# Altium PCB iron_board_PCB.PcbDoc (part 1 of 2)
Units mil, origin at the board's own origin, x right, y up, seen from the top; angles counter-clockwise.
Board outline 1620 x 2202.72 mil, 4 copper layers (Top Layer, Mid Layer 1, Mid Layer 2, Bottom Layer), stack 61.811 mil thick; 72 components, 48 nets, 259 pads, 44 vias.
Unrouted connection lines stored in the file: 114.
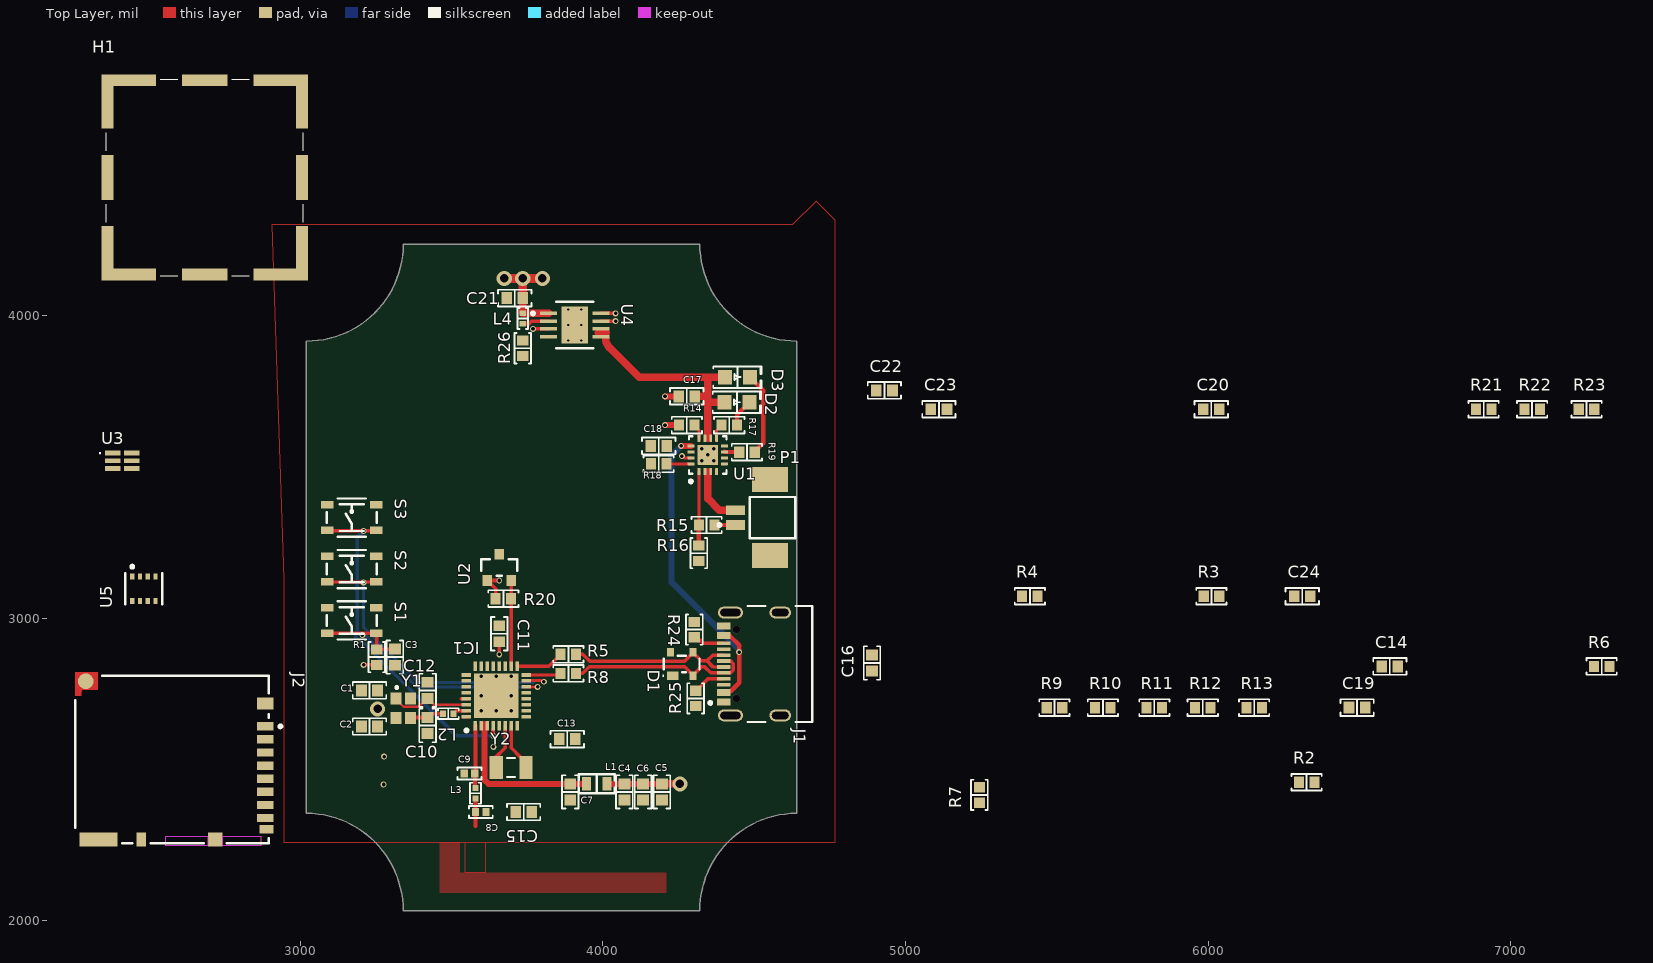
[diagram p0: Top Layer view]
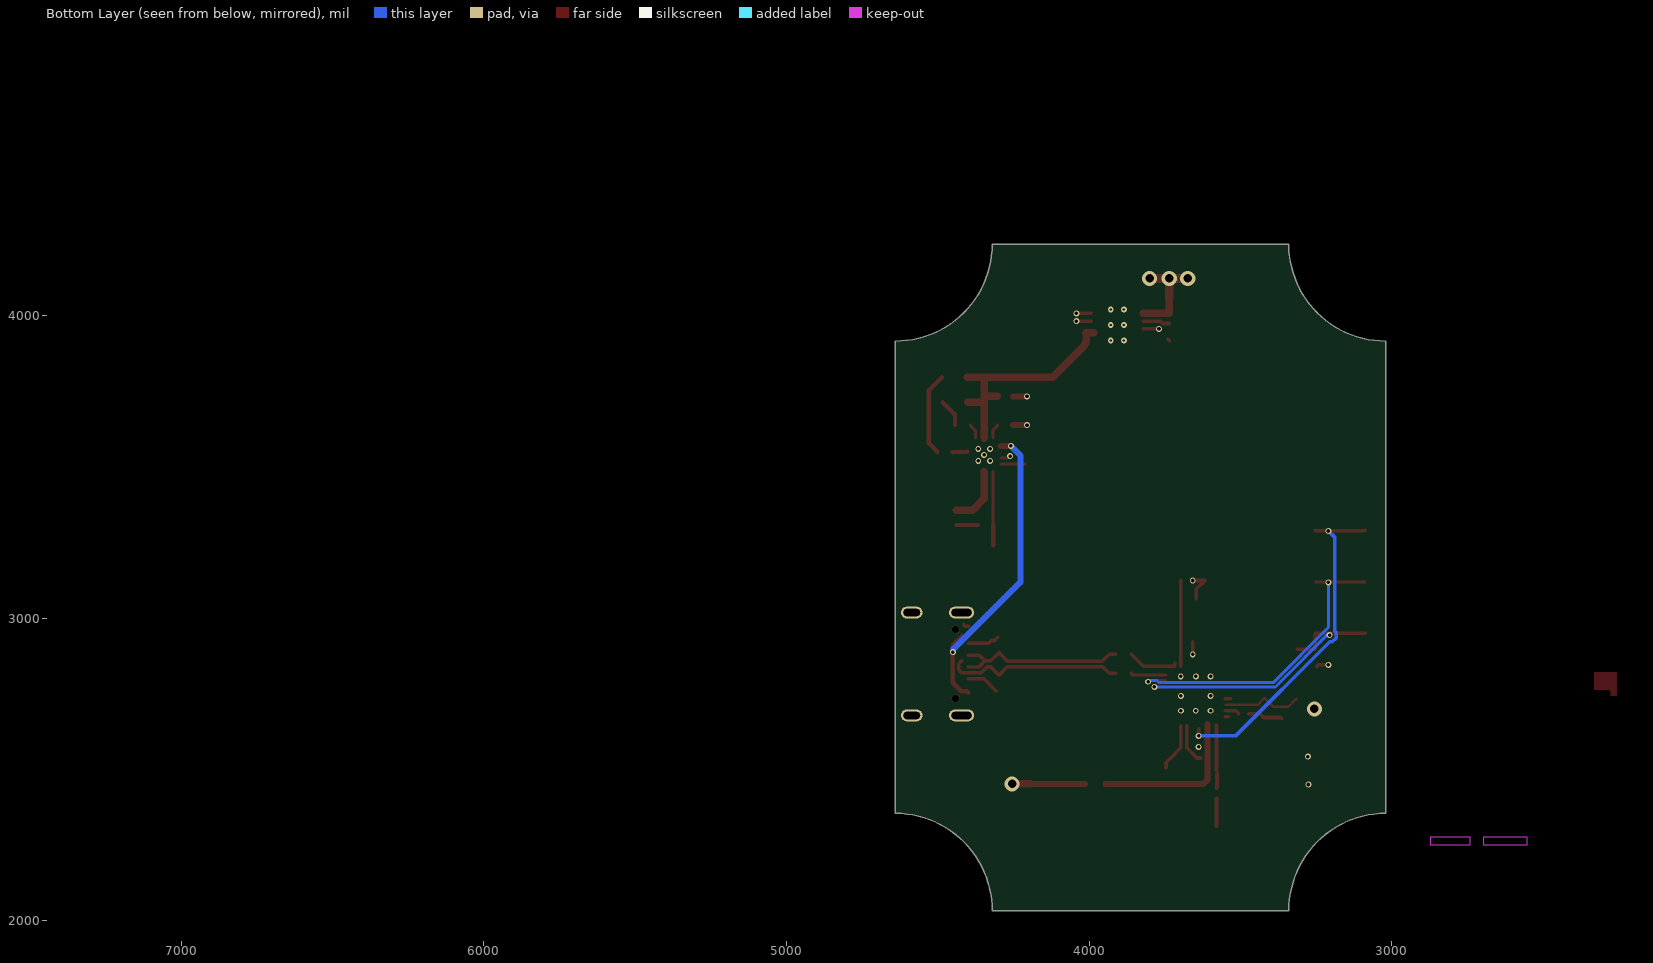
[diagram p1: Bottom Layer view, seen from below]
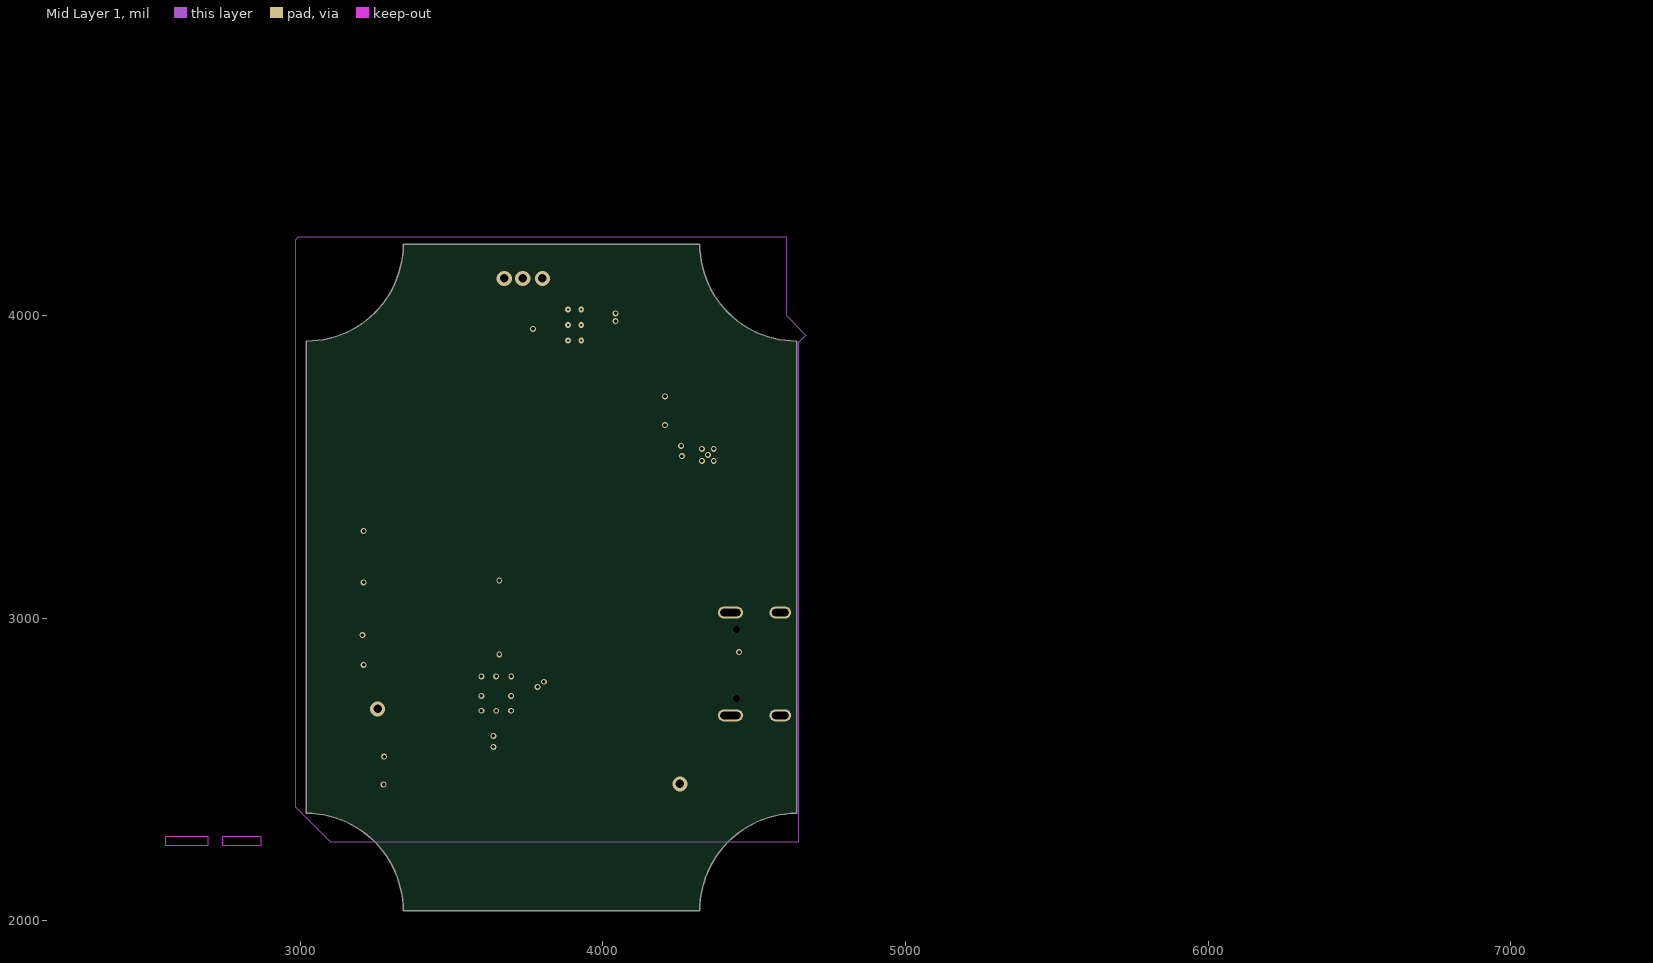
[diagram p2: Mid Layer 1]
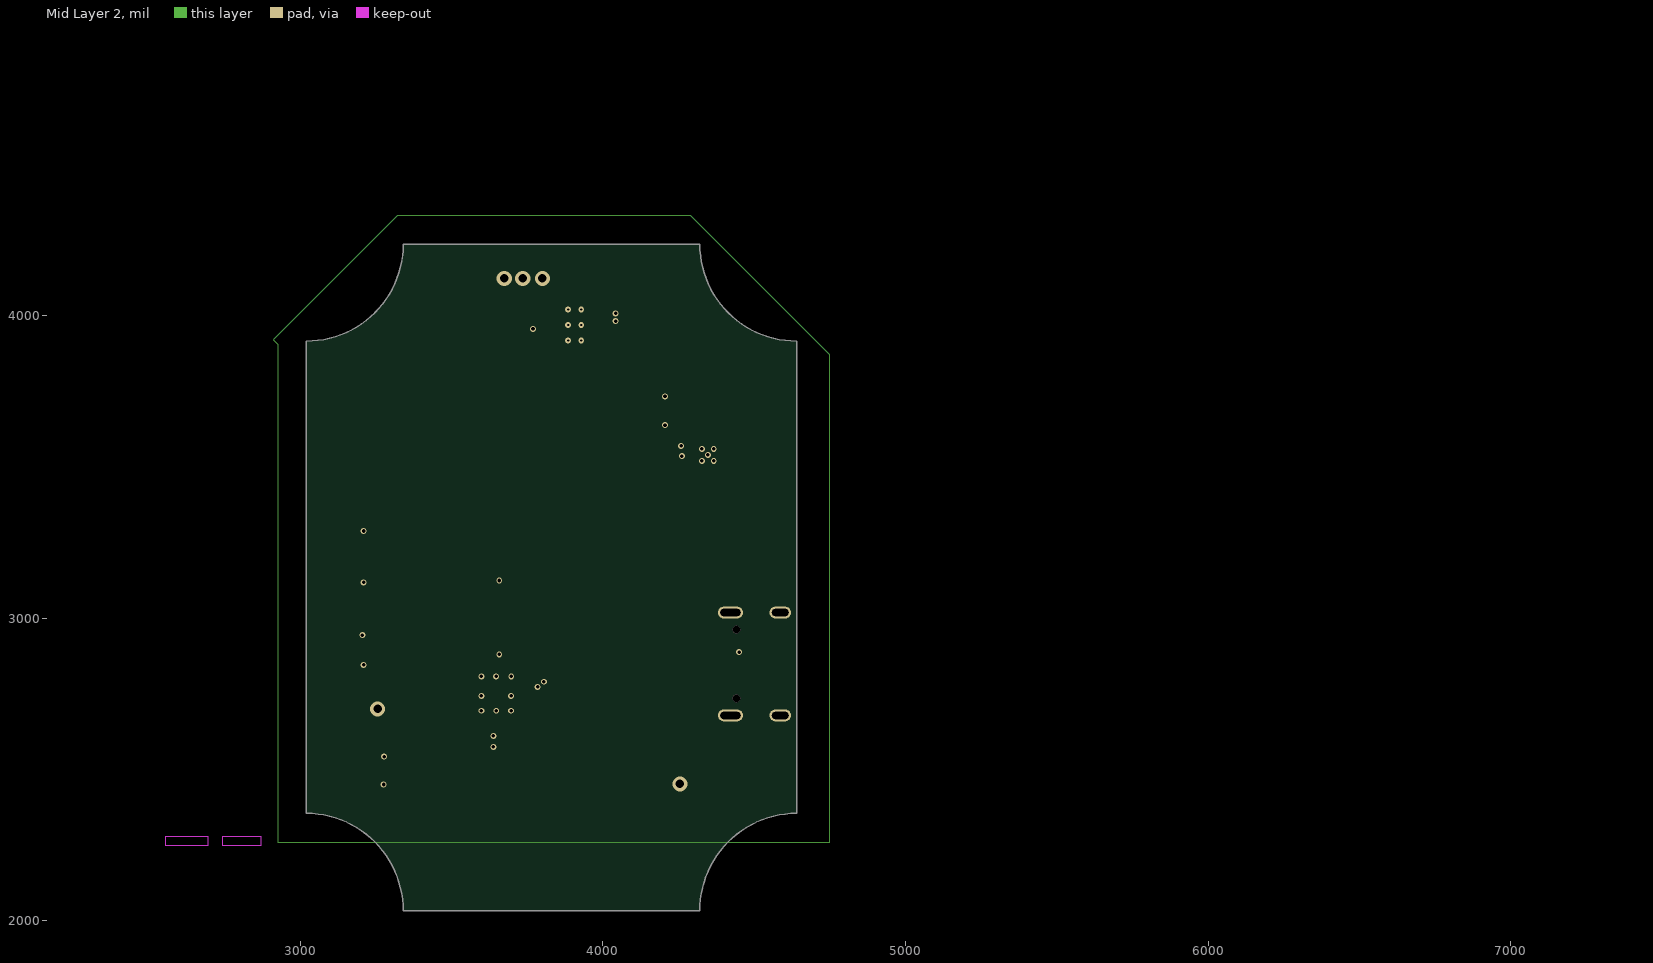
[diagram p3: Mid Layer 2]

## Layer stack, top to bottom
Top Solder: solder mask 0.5, Solder Resist, Dk 3.8
Top Layer: signal copper 1.378
Dielectric 1: prepreg 7.874, 7628, Dk 4.4
Mid Layer 1: signal copper 0.689
Core: core 41.929, FR-4, Dk 4.6
Mid Layer 2: signal copper 0.689
Dielectric 2: prepreg 7.874, 7628, Dk 4.4
Bottom Layer: signal copper 1.378
Bottom Solder: solder mask 0.5, Solder Resist, Dk 3.8

## Board outline
3020,2355 cw(c3018.61,2033.67) 3339.95,2032.28 4319.95,2032.28 cw(c4641.33,2033.61) 4640,2355 4640,3915 cw(c4640,4235) 4320,4235 3340,4235 cw(c3020,4235) 3020,3915

## Design rules (kind name [scope] priority, off if disabled: settings)
BoardOutlineClearance [All] p1: gap=7.87 ignorepadtopadclearanceinfootprint=FALSE
Clearance [All] p1: gap=4 ignorepadtopadclearanceinfootprint=FALSE except(5: Arc-Via Track-Via SMDPad-Via THPad-Via Via-Via Via-Fill Via-Poly Via-Region Via-Text; 9.84: Arc-Hole Track-Hole SMDPad-Hole THPad-Hole Via-Hole Fill-Hole Poly-Hole Region-Hole Text-Hole)
ComponentClearance [All] p1: gap=4 collisioncheckmode=3 verticalgap=4 showdistances=TRUE
DiffPairsRouting DiffPair_USBDiffPairsRouting [InDifferentialPair ('USB')] p1: maxlimit=10 minlimit=8 mostfreqgap=8 toplayer_maxgap=8 toplayer_minwidth=11.48 toplayer_maxwidth=11.48 toplayer_prefwidth=11.81 bottomlayer_maxgap=8 bottomlayer_minwidth=11.48 bottomlayer_maxwidth=11.48 bottomlayer_prefwidth=11.81 impedanceprofiledriven=TRUE impedanceprofileid={0D85EF6E-91C8-4706-80FB-7CD16DC580A1} impedanceprofilevalue=90.000000 maxuncoupledlength=500
DiffPairsRouting DiffPair_DiffPairsRouting [InDifferentialPair ('USB')] p2: maxlimit=10 minlimit=7.5 mostfreqgap=8 toplayer_mingap=8 toplayer_maxgap=8 toplayer_minwidth=11.48 toplayer_maxwidth=11.48 toplayer_prefwidth=11.81 bottomlayer_mingap=8 bottomlayer_maxgap=8 bottomlayer_minwidth=11.48 bottomlayer_maxwidth=11.48 bottomlayer_prefwidth=11.81 impedanceprofiledriven=TRUE impedanceprofileid={0D85EF6E-91C8-4706-80FB-7CD16DC580A1} impedanceprofilevalue=90.000000 maxuncoupledlength=500
DiffPairsRouting DiffPair_DiffPairsRouting_1 [InDifferentialPair ('USB')] p3: maxlimit=10 minlimit=7.5 mostfreqgap=8 toplayer_mingap=8 toplayer_maxgap=8 toplayer_minwidth=11.48 toplayer_maxwidth=11.48 toplayer_prefwidth=11.81 bottomlayer_mingap=8 bottomlayer_maxgap=8 bottomlayer_minwidth=11.48 bottomlayer_maxwidth=11.48 bottomlayer_prefwidth=11.81 impedanceprofiledriven=TRUE impedanceprofileid={0D85EF6E-91C8-4706-80FB-7CD16DC580A1} impedanceprofilevalue=90.000000 maxuncoupledlength=500
DiffPairsRouting DiffPair_DiffPairsRouting_2 [InDifferentialPair ('USB')] p4: maxlimit=10 minlimit=10 mostfreqgap=10 toplayer_minwidth=15 toplayer_maxwidth=15 toplayer_prefwidth=15 midlayer1_minwidth=15 midlayer1_maxwidth=15 midlayer1_prefwidth=15 midlayer2_minwidth=15 midlayer2_maxwidth=15 midlayer2_prefwidth=15 bottomlayer_minwidth=15 bottomlayer_maxwidth=15 bottomlayer_prefwidth=15 maxuncoupledlength=500
DiffPairsRouting DiffPair_DiffPairsRouting_3 [InDifferentialPair ('USB')] p5: maxlimit=10 minlimit=5 mostfreqgap=8 toplayer_mingap=8 toplayer_maxgap=8 toplayer_minwidth=11.48 toplayer_maxwidth=11.48 toplayer_prefwidth=11.81 bottomlayer_mingap=8 bottomlayer_maxgap=8 bottomlayer_minwidth=11.48 bottomlayer_maxwidth=11.48 bottomlayer_prefwidth=11.81 impedanceprofiledriven=TRUE impedanceprofileid={0D85EF6E-91C8-4706-80FB-7CD16DC580A1} impedanceprofilevalue=90.000000 maxuncoupledlength=500
DiffPairsRouting DiffPair_DiffPairsRouting_4 [InDifferentialPair ('USB')] p6: maxlimit=10 minlimit=10 mostfreqgap=10 toplayer_minwidth=15 toplayer_maxwidth=15 toplayer_prefwidth=15 midlayer1_minwidth=15 midlayer1_maxwidth=15 midlayer1_prefwidth=15 midlayer2_minwidth=15 midlayer2_maxwidth=15 midlayer2_prefwidth=15 bottomlayer_minwidth=15 bottomlayer_maxwidth=15 bottomlayer_prefwidth=15 maxuncoupledlength=500
DiffPairsRouting [All] p7: maxlimit=4 minlimit=4 mostfreqgap=4 toplayer_minwidth=4 toplayer_maxwidth=71497.94 toplayer_prefwidth=4 midlayer1_minwidth=4 midlayer1_maxwidth=71497.94 midlayer1_prefwidth=4 midlayer2_minwidth=4 midlayer2_maxwidth=71497.94 midlayer2_prefwidth=4 bottomlayer_minwidth=4 bottomlayer_maxwidth=71497.94 bottomlayer_prefwidth=4 maxuncoupledlength=500
Height [All] p1: minheight=0 maxheight=71497.94 prefheight=500
HoleSize [All] p1: absolutevalues=TRUE maxlimit=248.03 minlimit=7.87 maxpercent=80.000 minpercent=20.000
HoleToHoleClearance [All] p1: gap=9.84 allowstackedmicrovias=FALSE
MatchedLengths DiffPair_USBMatchedLengths [InDifferentialPair ('USB')] p1: tolerance=1000 checknetsindiffpair=FALSE checkdiffpairvsdiffpair=TRUE checkxsignals=TRUE checkothers=TRUE
MatchedLengths DiffPair_MatchedLengths [InDifferentialPair ('USB')] p2: tolerance=1000 checknetsindiffpair=FALSE checkdiffpairvsdiffpair=TRUE checkxsignals=TRUE checkothers=TRUE
MatchedLengths DiffPair_MatchedLengths_1 [InDifferentialPair ('USB')] p3: tolerance=1000 checknetsindiffpair=FALSE checkdiffpairvsdiffpair=TRUE checkxsignals=TRUE checkothers=TRUE
MatchedLengths DiffPair_MatchedLengths_2 [InDifferentialPair ('USB')] p4: tolerance=1000 checknetsindiffpair=FALSE checkdiffpairvsdiffpair=TRUE checkxsignals=TRUE checkothers=TRUE
MatchedLengths DiffPair_MatchedLengths_3 [InDifferentialPair ('USB')] p5: tolerance=1000 checknetsindiffpair=TRUE checkdiffpairvsdiffpair=FALSE checkxsignals=FALSE checkothers=FALSE
MatchedLengths DiffPair_MatchedLengths_4 [InDifferentialPair ('USB')] p6: tolerance=1000 checknetsindiffpair=FALSE checkdiffpairvsdiffpair=TRUE checkxsignals=TRUE checkothers=TRUE
MinimumAnnularRing [All] p1: minimumring=3
MinimumSolderMaskSliver [All] p1: minsoldermaskwidth=0
PlaneClearance [All] p1: clearance=12
PlaneConnect PlaneConnectPowerPads [InPadClass('PowerPads')] p1: planeconnectstyle=Direct reliefexpansion=20 reliefentries=4 reliefconductorwidth=10 reliefairgap=10
PlaneConnect [All] p2: pad.planeconnectstyle=Relief pad.reliefexpansion=11.81 pad.reliefentries=4 pad.reliefconductorwidth=4 pad.reliefairgap=4 via.planeconnectstyle=Direct via.reliefexpansion=11.81 via.reliefentries=4 via.reliefconductorwidth=5 via.reliefairgap=5
PolygonConnect PolygonConnectPowerPads [All vs (InPadClass('PowerPads'))] p1: connectstyle=Direct reliefconductorwidth=10 reliefentries=4 polygonreliefangle="90 Angle" airgapwidth=10
PolygonConnect [All] p2: thpad.connectstyle=Relief thpad.reliefconductorwidth=8 thpad.reliefentries=4 thpad.polygonreliefangle="45 Angle" thpad.airgapwidth=8 smdpad.connectstyle=Relief smdpad.reliefconductorwidth=8 smdpad.reliefentries=4 smdpad.polygonreliefangle="45 Angle" smdpad.airgapwidth=8 via.connectstyle=Direct via.reliefconductorwidth=5 via.reliefentries=4 via.polygonreliefangle="90 Angle" via.airgapwidth=5
RoutingVias [All] p1: holewidth=7.87 width=17.72 viastyle="Through Hole" minholewidth=7.87 minwidth=17.72 maxholewidth=248.03 maxwidth=257.87
SilkToSilkClearance [All] p1: silktosilkclearance=0
SilkToSolderMaskClearance [IsPad] p1: minsilkscreentomaskgap=4 clearancetoexposedcopper=TRUE
SolderMaskExpansion [All] p1: expansion=2.95 istentingtop=FALSE
Width [All] p1: maxlimit=71497.94 minlimit=4 preferedwidth=12.8 midlayer1_maxwidth=71497.94 midlayer1_prefwidth=10.04 midlayer2_maxwidth=71497.94 midlayer2_prefwidth=10.04 minimp=50.000000 maximp=50.000000 favimp=50.000000
20 further rules are at their usual default settings.

## Classes and differential pairs
net class USB_P: USB_N
component class peripherals: C17 C18 C19 C20 C21 C22 C23 D2 D3 J1 J2 L4 P1 R9 R10 R11 R12 R13 R14 R15 R16 R17 R18 R19 R20 R21 R22 R23 R24 R25 R26 U1 U2 U3 U4 U5
component class MCU: C1 C2 C3 C4 C5 C6 C7 C8 C9 C10 C11 C12 C13 C14 C15 C16 C24 D1 H1 IC1 L1 L2 L3 R1 R2 R3 R4 R5 R6 R7 R8 S1 S2 S3 Y1 Y2
differential pair XTAL: +XTAL_P -XTAL_N
differential pair USB: +USB_P -USB_N
differential pair RTC: +RTC_P -RTC_N

## Components (designator, comment, footprint, x,y, rotation, side; value= is the part's Value field where it differs from the comment)
C1 "1 µF" "CAP 0603_1608" 3228.61,2761.06 r0 top
C2 "0.1 µF" "CAP 0603_1608" 3228.61,2641.68 r0 top
C3 "0.1 µF" "CAP 0603_1608" 3312.55,2870.86 r90 top
C4 "10 µF" "CAP 0603_1608" 4071.12,2425.43 r270 top
C5 "1 µF" "CAP 0603_1608" 4132.52,2425.43 r90 top
C6 "0.1 µF" "CAP 0603_1608" 4194.52,2425.43 r90 top
C7 "0.1 µF" "CAP 0603_1608" 3891.84,2425.43 r90 top
C8 "TBD" "CAP 0402_1005" 3596.57,2359.14 r0 top
C9 "TBD" "CAP 0402_1005" 3559.17,2486.46 r0 top
C10 "10 pF" "CAP 0603_1608" 3420.32,2644.85 r270 top
C11 "0.1 µF" "CAP 0603_1608" 3657.27,2948 r270 top
C12 "10 pF" "CAP 0603_1608" 3420.32,2761.06 r90 top
C13 "0.1 µF" "CAP 0603_1608" 3882,2600 r180 top
C14 "1 µF" "CAP 0603_1608" 6600,2840 r0 top
C15 "6.8 pF" "CAP 0603_1608" 3738.02,2359.14 r180 top
C16 "6.8 pF" "CAP 0603_1608" 4889,2851.57 r90 top
C17 "4.7 µF" "CAP 0603_1608" 4276.98,3732.68 r0 top
C18 "1 µF" "CAP 0603_1608" 4184.18,3568.65 r0 top
C19 "10 µF" "CAP 0603_1608" 6491.85,2704 r0 top
C20 "0.1 µF" "CAP 0603_1608" 6010,3690 r0 top
C21 "10 µF" "CAP 0603_1608" 3708.43,4057 r180 top
C22 "0.1 µF" "CAP 0603_1608" 4930,3752 r0 top
C23 "0.1 µF" "CAP 0603_1608" 5110,3690 r0 top
C24 "0.1 µF" "CAP 0603_1608" 6310.57,3072 r0 top
D1 "PRTR5V0U2X,215" NXP-SOT143B-4_V 4260.02,2848.16 r90 top
D2 "Green" "LED 0805_2012 GREEN" 4442.8,3713 r0 top
D3 "Yellow" "LED 0805_2012 YELLOW" 4444.43,3796 r0 top
H1 "2118707-2" 21187072 2684.13,4455.98 r0 top
IC1 "ESP32-C6FH4" QFN50P500X500X90-33N 3647.43,2742.9 r90 top
J1 "USB4105-GF-A" FP-USB4105-GF-A-MFG 4540.02,2848.16 r90 top locked
J2 "DM3BT-DSF-PEJS" FP-DM3BT-DSF-PEJS-MFG 2576,2533 r270 top
L1 "2nH" "IND 0603_1608 RF WW" 3979.52,2452 r180 top
L2 "TBD" "IND 0402_1005 RF WW" 3489,2684 r180 top
L3 "TBD" "IND 0402_1005 RF WW" 3578.86,2421.14 r90 top
L4 "2.2 µH" "IND 0402_1005 RF WW" 3735,3989.68 r90 top
P1 "53261-0271" MOLX-53261-0271_V 4495,3332 r90 top
R1 "10 kOhms" "RES 0603_1608" 3252.68,2870.86 r270 top
R2 "0 Ohms" "RES 0603_1608" 6325,2457.44 r0 top
R3 "0 Ohms" "RES 0603_1608" 6010.57,3072 r0 top
R4 "0 Ohms" "RES 0603_1608" 5410.57,3072 r0 top
R5 "0 Ohms" "RES 0603_1608" 3885.7,2880 r180 top
R6 "10 kOhms" "RES 0603_1608" 7300,2840 r0 top
R7 "TBD" "RES 0603_1608" 5244,2415.41 r90 top
R8 "0 Ohms" "RES 0603_1608" 3885.7,2817 r0 top
R9 "10 kOhms" "RES 0603_1608" 5491.85,2704 r0 top
R10 "10 kOhms" "RES 0603_1608" 5651.85,2704 r0 top
R11 "10 kOhms" "RES 0603_1608" 5821.85,2704 r0 top
R12 "10 kOhms" "RES 0603_1608" 5981.85,2704 r0 top
R13 "10 kOhms" "RES 0603_1608" 6151.85,2704 r0 top
R14 "3.09 kOhms" "RES 0603_1608" 4276.98,3637.69 r0 top
R15 "0 Ohms" "RES 0603_1608" 4342.41,3307.39 r0 top
R16 "0 Ohms" "RES 0603_1608" 4316.82,3214.41 r90 top
R17 "0 Ohms" "RES 0603_1608" 4417.21,3637.69 r0 top
R18 "1.8 kOhms" "RES 0603_1608" 4184.18,3509.59 r0 top
R19 "0 Ohms" "RES 0603_1608" 4475.87,3548.13 r0 top
R20 "1.2 kOhms" "RES 0603_1608" 3671.05,3064 r0 top
R21 "10 kOhms" "RES 0603_1608" 6910,3690 r0 top
R22 "10 kOhms" "RES 0603_1608" 7070,3690 r0 top
R23 "10 kOhms" "RES 0603_1608" 7250,3690 r0 top
R24 "5.1 kOhms" "RES 0603_1608" 4301.97,2961.94 r270 top
R25 "5.1 kOhms" "RES 0603_1608" 4306.28,2734.38 r90 top
R26 "52.3 kOhms" "RES 0603_1608" 3735,3891.41 r90 top
S1 "PTS810 SJM 250 SMTR LFS" "C&K PTS810" 3170,2992 r0 top
S2 "PTS810 SJM 250 SMTR LFS" "C&K PTS810" 3170,3162 r0 top
S3 "PTS810 SJM 250 SMTR LFS" "C&K PTS810" 3170,3332 r0 top
U1 "BQ24073RGTT" RGT0016C_V 4346.35,3539.12 r90 top
U2 "TLE49655MXTSA1" FP-PG-SOT23-3-MFG 3657.27,3167.31 r90 top
U3 "TSL2561FN" AMS-FN-6-2000X2000DE_V 2411,3520 r0 top
U4 "TPS62842DGRR" FP-DGR0008A-MFG 3906.65,3968.18 r0 top
U5 "BME280" FP-BME280-MFG 2483,3097 r90 top
Y1 "830108208709" WE-XTAL_CFPX-218 3340.11,2701.72 r270 top
Y2 "ABS07-32.768KHZ-7-1-T" FP-ABS07-MFG 3696.64,2506.15 r0 top

## Footprints (in the part's own frame and the unit in brackets; to place one, negate y for a bottom-side part, rotate by r counter-clockwise, add the part's x,y. Pads: shape width x height; smd on the part's side, far side on the other; paste and mask are expansions set on the pad)
21187072 [mm]
  rect 1x4.55 smd: 1(-8.15,6.375) 3(-8.15,-6.375) 7(8.15,-6.375) 9(8.15,6.375)
  rect 1x3.8 smd: 2(-8.15,0) 8(8.15,0)
  rect 4.55x1 smd: 4(-6.375,-8.15) 6(6.375,-8.15) 10(6.375,8.15) 12(-6.375,8.15)
  rect 3.8x1 smd: 5(0,-8.15) 11(0,8.15)
  silkscreen extent -8.25,-8.25 8.25,8.25, body extent -8.25,-8.25 8.25,8.25, height 3.6
AMS-FN-6-2000X2000DE_V [mm] "SON, 6-Leads, Body 2x2mm, Pitch 0.65mm"
  rect 1.3x0.4 smd: 1(-0.8,0.65) 2(-0.8,0) 3(-0.8,-0.65) 4(0.8,-0.65) 5(0.8,0) 6(0.8,0.65)
  silkscreen extent -1.9,0.59 -1.8,0.68, body extent -1,-1 1,1, height 0.7
"C&K PTS810" [mm] "T-Switch, 4-leads, body 4.2x3.2mm, C&K PTS810 SJM 250 SMTR LFS"
  rect 1.05x0.65 smd mask+0.1: 1(-2.075,1.075) 2(2.075,1.075) 3(-2.075,-1.075) 4(2.075,-1.075)
  silkscreen extent -2.1,-1.6 2.1,1.6, body extent -2.29,-1.6 2.29,1.6, height 2.7
"CAP 0402_1005" [mm] "Chip Capacitor, 2-Leads, Body 1.02x0.51mm, IPC Medium Density"
  rect 0.6x0.64 smd: 1(-0.44,0) 2(0.44,0)
  silkscreen extent -1,-0.5 1,0.5, body extent -0.5,-0.26 0.5,0.26, height 0.52
"CAP 0603_1608" [mm] "Chip Capacitor, 2-Leads, Body 1.60x0.80mm, IPC Medium Density"
  rect 0.9x1 smd: 1(-0.675,0) 2(0.675,0)
  silkscreen extent -1.4,-0.7 1.4,0.7, body extent -0.8,-0.41 0.8,0.41, height 0.82
FP-ABS07-MFG [mm]
  rect 1.1x1.9 smd paste+0 mask+0: 1(-1.25,0) 2(1.25,0)
  silkscreen extent -0.32,-0.8 0.32,0.8, body extent -1.9,-1.05 1.9,1.05, height 0.25
FP-BME280-MFG [mm]
  rect 0.5x0.35 smd paste+0 mask+0: 1(1.025,0.975) 2(1.025,0.325) 3(1.025,-0.325) 4(1.025,-0.975) 5(-1.025,-0.975) 6(-1.025,-0.325) 7(-1.025,0.325) 8(-1.025,0.975)
  silkscreen extent -1.3,-1.55 1.97,1.55
FP-DGR0008A-MFG [mm]
  rrect33% 1.45x0.3 smd paste+0 mask+0: 1(-2.2,0.975) 2(-2.2,0.325) 3(-2.2,-0.325) 4(-2.2,-0.975) 5(2.2,-0.975) 6(2.2,-0.325) 7(2.2,0.325) 8(2.2,0.975)
  rect 2.2x3.1 smd paste-1000 mask-1000: 9(0,0)
  silkscreen extent -3.62,-1.95 1.55,1.95, body extent -3.03,-1.95 3.03,1.95, height 0.25
FP-DM3BT-DSF-PEJS-MFG [mm]
  rect 0.7x1.4 smd paste+0 mask+0: 1(-2.775,7.825) 2(-1.675,7.825) 3(-0.575,7.825) 4(0.525,7.825) 5(1.625,7.825) 6(2.725,7.825) 7(3.825,7.825) 8(4.925,7.825)
  rect 0.7x1.2 smd paste+0 mask+0: 9(5.875,7.925)
  rect 1.2x0.8 smd paste+0 mask+0: 10(6.725,-2.575)
  rect 1x1.4 smd paste+0 mask+0: 11(-4.675,7.825)
  rect 1.2x1.2 smd paste+0 mask+0: 12(6.725,3.625)
  round 1.311 smd paste+0 mask+0: 13(-6.553,-7.234)
  rect 1.2x3.2 smd paste+0 mask+0: 14(6.725,-6.175)
  Top Layer region: -7.325,-8.125 -7.325,-6.225 -5.825,-6.225 -5.825,-7.475 -5.675,-7.625 -5.325,-7.625 -5.325,-8.125
  Keep-Out Layer region: 6.475,4.225 7.225,4.225 7.225,7.475 6.475,7.475
  Keep-Out Layer region: 6.475,-0.575 7.225,-0.575 7.225,3.025 6.475,3.025
  silkscreen extent -7.02,-8.13 7.02,9.23, body extent -7.42,-8.23 7.42,8.62, height 0.25
FP-PG-SOT23-3-MFG [mm]
  rect 0.9x0.8 smd paste+0 mask+0: 1(-1.1,1) 2(-1.1,-1) 3(1.1,0)
  silkscreen extent -0.7,-1.5 0.7,1.5, body extent -1.65,-1.6 1.65,1.6, height 0.25
FP-USB4105-GF-A-MFG [mm]
  rrect100% 1x2.1 hole 1.7 slot 0.6 at 0 deg paste-2539.97 mask+0: 1(-4.32,3.015) 2(4.32,3.015)
  rrect100% 1x1.8 hole 1.4 slot 0.6 at 0 deg paste-2539.97 mask+0: 3(-4.32,-1.165) 4(4.32,-1.165)
  rect 0.6x1.15 smd paste+0 mask+0: A1-B12(-3.2,3.59) A4-B9(-2.4,3.59) B1-A12(3.2,3.59) B4-A9(2.4,3.59)
  rect 0.3x1.15 smd paste+0 mask+0: A5(-1.25,3.59) A6(-0.25,3.59) A7(0.25,3.59) A8(1.25,3.59) B5(1.75,3.59) B6(0.75,3.59) B7(-0.75,3.59) B8(-1.75,3.59)
  round 0.65 hole 0.65 unplated paste-2539.97 mask+0: ""(-2.89,2.515) ""(2.89,2.515)
  silkscreen extent -4.86,-3.84 4.86,4.84, body extent -4.96,-3.94 4.96,4.27, height 0.25
"IND 0402_1005 RF WW" [mm] "Chip Inductor, 2-Leads, Body 1.00x0.50mm, IPC High Density"
  rect 0.48x0.54 smd: 1(-0.44,0) 2(0.44,0)
  silkscreen extent -0.87,-0.45 0.87,0.45, body extent -0.5,-0.29 0.5,0.29, height 0.51
"IND 0603_1608 RF WW" [mm] "Chip Inductor, 2-Leads, Body 1.65x0.99mm, IPC Medium Density"
  rect 0.76x1.13 smd: 1(-0.875,0) 2(0.875,0)
  silkscreen extent -1.5,-0.8 1.5,0.8, body extent -0.84,-0.58 0.83,0.58, height 1
"LED 0805_2012 GREEN" [mm] "Chip Diode, 2-Leads, Body 2.00x1.25mm, IPC Medium Density"
  rect 1.2x1.2 smd: 1(-1.05,0) 2(1.05,0)
  silkscreen extent -2.03,-0.9 2.03,0.9, body extent -1,-0.62 1,0.63, height 0.9
"LED 0805_2012 YELLOW" [mm] "Chip Diode, 2-Leads, Body 2.00x1.25mm, IPC Medium Density"
  rect 1.2x1.2 smd: 1(-1.05,0) 2(1.05,0)
  silkscreen extent -2.03,-0.9 2.03,0.9, body extent -1,-0.62 1,0.63, height 0.9
MOLX-53261-0271_V [mm] "Header, 2-Leads, Pitch 1.25mm"
  rect 0.8x1.6 smd: 1(-0.625,1.45) 2(0.625,1.45)
  rect 2.1x3 smd: MP1(-3.175,-1.45) MP2(3.175,-1.45)
  silkscreen extent -1.72,-3.55 1.73,2.92, body extent -3.82,-3.55 3.83,1.65, height 3.41
NXP-SOT143B-4_V [mm] "SOT143, 4-Leads, Body 3x1.4mm"
  rect 0.7x1 smd: 1(-1,0.75)
  rect 0.7x0.6 smd: 2(-1,-0.95) 3(1,-0.95) 4(1,0.95)
  silkscreen extent -1.05,-1.5 0.7,1.6, body extent -0.7,-1.5 0.7,1.5, height 1.1
QFN50P500X500X90-33N [mm]
  rect 0.8x0.3 smd: 1(-2.5,1.75) 2(-2.5,1.25) 3(-2.5,0.75) 4(-2.5,0.25) 5(-2.5,-0.25) 6(-2.5,-0.75) 7(-2.5,-1.25) 8(-2.5,-1.75) 17(2.5,-1.75) 18(2.5,-1.25) 19(2.5,-0.75) 20(2.5,-0.25) 21(2.5,0.25) 22(2.5,0.75) 23(2.5,1.25) 24(2.5,1.75)
  rect 0.3x0.8 smd: 9(-1.75,-2.5) 10(-1.25,-2.5) 11(-0.75,-2.5) 12(-0.25,-2.5) 13(0.25,-2.5) 14(0.75,-2.5) 15(1.25,-2.5) 16(1.75,-2.5) 25(1.75,2.5) 26(1.25,2.5) 27(0.75,2.5) 28(0.25,2.5) 29(-0.25,2.5) 30(-0.75,2.5) 31(-1.25,2.5) 32(-1.75,2.5)
  rect 3.75x3.75 smd: 33(0,0)
  silkscreen extent -3.02,2.37 -2.78,2.62, body extent -2.55,-2.55 2.55,2.55, height 0.9
"RES 0603_1608" [mm] "Chip Resistor, 2-Leads, Body 1.60x0.80mm, IPC Medium Density"
  rect 0.85x0.95 smd: 1(-0.65,0) 2(0.65,0)
  silkscreen extent -1.27,-0.7 1.27,0.7, body extent -0.8,-0.4 0.8,0.4, height 0.45
RGT0016C_V [mm] "QFN, 16-Leads, Body 3x3mm, Pitch 0.5mm, Thermal Pad 1.65x1.65mm"
  rrect40% 0.6x0.25 smd: 1(-1.4,0.75) 2(-1.4,0.25) 3(-1.4,-0.25) 4(-1.4,-0.75) 9(1.4,-0.75) 10(1.4,-0.25) 11(1.4,0.25) 12(1.4,0.75)
  rrect40% 0.25x0.6 smd: 5(-0.75,-1.4) 6(-0.25,-1.4) 7(0.25,-1.4) 8(0.75,-1.4) 13(0.75,1.4) 14(0.25,1.4) 15(-0.25,1.4) 16(-0.75,1.4)
  rrect6% 1.55x1.55 on Top Paste: 17(0,0)
  rrect6% 1.7x1.7 smd paste-0.85: 17(0,0)
  silkscreen extent -2.35,-1.57 1.57,1.58, body extent -1.5,-1.5 1.5,1.5, height 1
WE-XTAL_CFPX-218 [mm] "Quartz Crystal, size CFPX-218, body 2.5x2mm"
  rect 1x0.9 smd: 1(-0.825,-0.613) 2(0.825,-0.613) 3(0.825,0.613) 4(-0.825,0.613)
  silkscreen extent -1.85,-0.65 -1.65,-0.45, body extent -1.25,-1 1.25,1, height 0.55

## Part data
C1 C5 C14 C18: library part CC0603KRX7R6BB105, "CAP CER 1UF 10V X7R 0603", Device Package="0603 (1608 Metric)", manufacturer=Yageo, Operating Temperature="-55°C ~ 125°C", Supplier Part Number 1=311-1796-1-ND, Temperature Coefficient=X7R, Tolerance=±10%, Voltage - Rated=10V, Applications="General Purpose", Capacitance="1 µF", componentlink1description=Datasheet, componentlink1url=https://www.yageo.com/upload/media/product/productsearch/datasheet/mlcc/UPY-GPHC_X7R_6.3V-to-50V_18.pdf, componentlink2description="DigiKey Link", componentlink2url=https://www.digikey.com/en/products/detail/yageo/CC0603KRX7R6BB105/5195204, lastupdated="15.01.2024 20:10:05", Lifecycle Status=Active, Minimum Order=1, Mounting Type="Surface Mount, MLCC", Package / Case="0603 (1608 Metric)", packaging=TapeAndReel, Part Number=CC0603KRX7R6BB105, Part Status=Active, partid=2290, price=0.01, series=CC, Size / Dimension="0.063\" L x 0.031\" W (1.60mm x 0.80mm)", Supplier 1=DigiKey, Thickness (Max)="0.035\" (0.90mm)"
C2 C3 C6 C7 C11 C13 C20 C22 C23 C24: library part CS0603KRX7R7BB104, "CAP CER 0.1UF 16V X7R 0603", Device Package="0603 (1608 Metric)", manufacturer=Yageo, Operating Temperature="-55°C ~ 125°C", Supplier Part Number 1=311-3560-1-ND, Temperature Coefficient=X7R, Tolerance=±10%, Voltage - Rated=16V, Applications="Boardflex Sensitive", Capacitance="0.1 µF", componentlink1description=Datasheet, componentlink1url=http://www.yageo.com/NewPortal/yageodocoutput?fileName=/pdf/MLCC/UPY-ST_NPOX7R_16V-to-3KV_5.pdf, componentlink2description="DigiKey Link", componentlink2url=https://www.digikey.com/en/products/detail/yageo/CS0603KRX7R7BB104/6097897, Features="Soft Termination", lastupdated="15.01.2024 20:10:05", Lifecycle Status=Active, Minimum Order=1, Mounting Type="Surface Mount, MLCC", Package / Case="0603 (1608 Metric)", packaging=TapeAndReel, Part Number=CS0603KRX7R7BB104, Part Status=Active, partid=2286, price=0.01, series=CS, Size / Dimension="0.063\" L x 0.031\" W (1.60mm x 0.80mm)", Supplier 1=DigiKey, Thickness (Max)="0.037\" (0.95mm)"
C4 C19 C21: library part GRM188D71A106KA73D, "CAP CER 10UF 10V X7T 0603", Device Package="0603 (1608 Metric)", manufacturer="Murata Electronics", Operating Temperature="-55°C ~ 125°C", Supplier Part Number 1=490-14461-1-ND, Temperature Coefficient=X7T, Tolerance=±10%, Voltage - Rated=10V, Applications="General Purpose", Capacitance="10 µF", componentlink1description=Datasheet, componentlink1url=https://search.murata.co.jp/Ceramy/image/img/A01X/G101/ENG/GRM188D71A106KA73-01.pdf, componentlink2description="DigiKey Link", componentlink2url=https://www.digikey.com/en/products/detail/murata-electronics/GRM188D71A106KA73D/6606090, lastupdated="15.01.2024 20:10:04", Lifecycle Status=Active, Minimum Order=1, Mounting Type="Surface Mount, MLCC", Package / Case="0603 (1608 Metric)", packaging=TapeAndReel, Part Number=GRM188D71A106KA73D, Part Status=Active, partid=2489, price=0.03, series=GRM, Size / Dimension="0.063\" L x 0.031\" W (1.60mm x 0.80mm)", Supplier 1=DigiKey, Thickness (Max)="0.039\" (1.00mm)"
C8: library part 04023A6R8CAT2A, "CAP CER 6.8PF 25V C0G/NP0 0402", Device Package="0402 (1005 Metric)", manufacturer="AVX Corporation", Operating Temperature="-55°C ~ 125°C", Supplier Part Number 1=478-12617-1-ND, Temperature Coefficient="C0G, NP0", Tolerance=±0.25pF, Voltage - Rated=25V, Applications="General Purpose", Capacitance=TBD, componentlink1description=Datasheet, componentlink1url=http://datasheets.avx.com/C0GNP0-Dielectric.pdf, componentlink2description="DigiKey Link", componentlink2url=http://digikey.com/product-detail/en/avx-corporation/04023A6R8CAT2A/478-12617-1-ND/9949155, lastupdated="08.02.2022 12:26:50", Lifecycle Status=Active, Minimum Order=1, Mounting Type="Surface Mount, MLCC", Package / Case="0402 (1005 Metric)", packaging=TapeAndReel, Part Number=04023A6R8CAT2A, Part Status=Active, partid=6987, price=0.06, series=-, Size / Dimension="0.039\" L x 0.020\" W (1.00mm x 0.50mm)", Supplier 1=DigiKey, Thickness (Max)="0.022\" (0.56mm)"
C9: library part 04023A6R8CAT2A, "CAP CER 6.8PF 25V C0G/NP0 0402", Capacitance=6.8pF, Device Package="0402 (1005 Metric)", manufacturer="AVX Corporation", Operating Temperature="-55°C ~ 125°C", Supplier Part Number 1=478-12617-1-ND, Temperature Coefficient="C0G, NP0", Tolerance=±0.25pF, Voltage - Rated=25V, Applications="General Purpose", componentlink1description=Datasheet, componentlink1url=http://datasheets.avx.com/C0GNP0-Dielectric.pdf, componentlink2description="DigiKey Link", componentlink2url=http://digikey.com/product-detail/en/avx-corporation/04023A6R8CAT2A/478-12617-1-ND/9949155, lastupdated="08.02.2022 12:26:50", Lifecycle Status=Active, Minimum Order=1, Mounting Type="Surface Mount, MLCC", Package / Case="0402 (1005 Metric)", packaging=TapeAndReel, Part Number=04023A6R8CAT2A, Part Status=Active, partid=6987, price=0.06, series=-, Size / Dimension="0.039\" L x 0.020\" W (1.00mm x 0.50mm)", Supplier 1=DigiKey, Thickness (Max)="0.022\" (0.56mm)"
C10 C12: library part VJ0603A100FXACW1BC, "CAP CER 10PF 50V C0G/NP0 0603", Device Package="0603 (1608 Metric)", manufacturer="Vishay Vitramon", Operating Temperature="-55°C ~ 125°C", Supplier Part Number 1=720-VJ0603A100FXACW1BCCT-ND, Temperature Coefficient="C0G, NP0", Tolerance=±1%, Voltage - Rated=50V, Applications="General Purpose", Capacitance="10 pF", componentlink1description=Datasheet, componentlink1url=https://www.vishay.com/docs/28548/vjw1bcbascomseries.pdf, componentlink2description="DigiKey Link", componentlink2url=https://www.digikey.com/en/products/detail/vishay-vitramon/VJ0603A100FXACW1BC/8302770, lastupdated="15.01.2024 20:09:38", Lifecycle Status=Active, Minimum Order=1, Mounting Type="Surface Mount, MLCC", Package / Case="0603 (1608 Metric)", packaging=TapeAndReel, Part Number=VJ0603A100FXACW1BC, Part Status=Active, partid=42121, price=0.01, series="VJ W1BC", Size / Dimension="0.063\" L x 0.031\" W (1.60mm x 0.80mm)", Supplier 1=DigiKey, Thickness (Max)="0.034\" (0.87mm)"
C15 C16: library part GQM1875C2E6R8WB12D, "CAP CER 6.8PF 250V C0G/NP0 0603", Device Package="0603 (1608 Metric)", manufacturer="Murata Electronics", Operating Temperature="-55°C ~ 125°C", Supplier Part Number 1=490-GQM1875C2E6R8WB12DCT-ND, Temperature Coefficient="C0G, NP0", Tolerance=±0.05pF, Voltage - Rated=250V, Applications="RF, Microwave, High Frequency", Capacitance="6.8 pF", componentlink1description=Datasheet, componentlink1url=https://search.murata.co.jp/Ceramy/image/img/A01X/G101/ENG/GQM1875C2E6R8WB12-01.pdf, componentlink2description="DigiKey Link", componentlink2url=https://www.digikey.com/en/products/detail/murata-electronics/GQM1875C2E6R8WB12D/16033646, Features="High Q, Low Loss", lastupdated="15.01.2024 20:09:09", Lifecycle Status=Active, Minimum Order=1, Mounting Type="Surface Mount, MLCC", Package / Case="0603 (1608 Metric)", packaging=TapeAndReel, Part Number=GQM1875C2E6R8WB12D, Part Status=Active, partid=50061, price=0.11, series=GQM, Size / Dimension="0.063\" L x 0.031\" W (1.60mm x 0.80mm)", Supplier 1=DigiKey, Thickness (Max)="0.031\" (0.80mm)"
C17: library part GRM188R61C475KE11D, "CAP CER 4.7UF 16V X5R 0603", Device Package="0603 (1608 Metric)", manufacturer="Murata Electronics", Operating Temperature="-55°C ~ 85°C", Supplier Part Number 1=490-10730-1-ND, Temperature Coefficient=X5R, Tolerance=±10%, Voltage - Rated=16V, Applications="General Purpose", Capacitance="4.7 µF", componentlink1description=Datasheet, componentlink1url=https://search.murata.co.jp/Ceramy/image/img/A01X/G101/ENG/GRM188R61C475KE11-01.pdf, componentlink2description="DigiKey Link", componentlink2url=https://www.digikey.com/en/products/detail/murata-electronics/GRM188R61C475KE11D/4905341, lastupdated="15.01.2024 20:10:04", Lifecycle Status=Active, Minimum Order=1, Mounting Type="Surface Mount, MLCC", Package / Case="0603 (1608 Metric)", packaging=TapeAndReel, Part Number=GRM188R61C475KE11D, Part Status=Active, partid=2388, price=0.03, series=GRM, Size / Dimension="0.063\" L x 0.031\" W (1.60mm x 0.80mm)", Supplier 1=DigiKey, Thickness (Max)="0.037\" (0.95mm)"
D1: library part CMP-2000-05285-1, "Ultra Low Capacitance Double Rail-to-Rail ESD Protection Diode, 5.5 V, 1 pF, -40 to 85 degC, 4-Pin SOT143B, RoHS, Tape and Reel", Capacitance Value=16pF, ESD Protection Voltage=8KV@ContactDisc, Leakage Current=0.1uA, manufacturer="NXP Semiconductors", Operating Temp Range=-40Cto85C, Operating Temperature Classification=Industrial, Operating Temperature Max Deg. C=85C, Operating Temperature Min Deg. C=-40C, Package / Case=SOT, Reverse Breakdown Voltage=6V, Reverse Stand-off Voltage=5.5V, Configuration=Quad, Datasheet URL=https://datasheet.ciiva.com/4479/prtr5v0u2x-102853-4479461.pdf, Datasheet Version="Rev. 02, 01/2008", Direction Type=Uni-Directional, Leakage Current (Max)=0.1uA, Manufacturer URL=http://www.nxp.com/, Mounting=SurfaceMount, Mounting Style=SurfaceMount, Number of Elements=1, Package Type=SOT, packaging=TapeandReel, Pin Count=3+Tab, Polarity=Uni-Directional, Product Depth (mm)=1.4mm, Product Height (mm)=1mm, Product Length (mm)=3mm, Rad Hardened=No, Suppressor Type=DiodeArrays, Working Voltage=5.5V, Working Voltage (Max)=5.5V
D2: library part 150080VS75000, "LED GREEN CLEAR 0805 SMD", Current - Test=20mA, Device Package="0805 (2012 Metric)", Lens Color=Colorless, manufacturer="Würth Elektronik", Millicandela Rating=40mcd, Supplier Device Package=0805, Supplier Part Number 1=732-4986-1-ND, Voltage - Forward (Vf) (Typ)=2V, Color=Green, componentlink1description=Datasheet, componentlink1url=https://katalog.we-online.de/led/datasheet/150080VS75000.pdf, componentlink2description="DigiKey Link", componentlink2url=https://www.digikey.com/en/products/detail/würth-elektronik/150080VS75000/4489924, Configuration=Standard, Height (Max)=0.80mm, lastupdated="15.01.2024 21:31:06", Lens Size="1.40mm x 1.25mm", Lens Style="Rectangle with Flat Top", Lens Transparency=Clear, Lifecycle Status=Active, Minimum Order=1, Mounting Type="Surface Mount", Package / Case="0805 (2012 Metric)", packaging=TapeAndReel, Part Number=150080VS75000, Part Status=Active, partid=300, price=0.13, series=WL-SMCW, Size / Dimension="2.00mm L x 1.25mm W", Supplier 1=DigiKey, Viewing Angle=140°, Wavelength - Dominant=570nm, Wavelength - Peak=572nm
D3: library part 150080YS75000, "LED YELLOW CLEAR 0805 SMD", Current - Test=20mA, Device Package="0805 (2012 Metric)", Lens Color=Colorless, manufacturer="Würth Elektronik", Millicandela Rating=120mcd, Supplier Device Package=0805, Supplier Part Number 1=732-4987-1-ND, Voltage - Forward (Vf) (Typ)=2V, Color=Yellow, componentlink1description=Datasheet, componentlink1url=https://katalog.we-online.de/led/datasheet/150080YS75000.pdf, componentlink2description="DigiKey Link", componentlink2url=https://www.digikey.com/en/products/detail/würth-elektronik/150080YS75000/4489927, Configuration=Standard, Height (Max)=0.80mm, lastupdated="15.01.2024 21:32:02", Lens Size="1.40mm x 1.25mm", Lens Style="Rectangle with Flat Top", Lens Transparency=Clear, Lifecycle Status=Active, Minimum Order=1, Mounting Type="Surface Mount", Package / Case="0805 (2012 Metric)", packaging=TapeAndReel, Part Number=150080YS75000, Part Status=Active, partid=56, price=0.13, series=WL-SMCW, Size / Dimension="2.00mm L x 1.25mm W", Supplier 1=DigiKey, Viewing Angle=140°, Wavelength - Dominant=590nm, Wavelength - Peak=595nm
H1: "Hardware", Manufacturer_Name="TE Connectivity", Mouser Part Number=571-2118707-2, Arrow Part Number=2118707-2, Arrow Price/Stock=https://www.arrow.com/en/products/2118707-2/te-connectivity?region=nac, Datasheet Link=https://www.te.com/commerce/DocumentDelivery/DDEController?Action=srchrtrv&DocNm=2118707&DocType=Customer+Drawing&DocLang=English, Height=3.6mm, Manufacturer_Part_Number=2118707-2, Mouser Price/Stock=https://www.mouser.co.uk/ProductDetail/TE-Connectivity/2118707-2?qs=u4fy%2FsgLU9NoXZXtwsPxvA%3D%3D
IC1: "Integrated Circuit", Manufacturer_Name="Espressif Systems", Mouser Part Number=356-ESP32-C6FH4, Datasheet Link=https://www.mouser.ch/ProductDetail/Espressif-Systems/ESP32-C6FH4?qs=sGAEpiMZZMu3sxpa5v1qriveB5Rxa06Y9iJOmwW58jU%3D, Height=0.9mm, Manufacturer_Part_Number=ESP32-C6FH4, Mouser Price/Stock=https://www.mouser.co.uk/ProductDetail/Espressif-Systems/ESP32-C6FH4?qs=Imq1NPwxi77uZvg%252BuAIiXA%3D%3D
J1: library part CMP-245163-000001-1, "CONN RCPT USB2.0 TYPEC 5A", Current Rating=5/6.25/1.25/0.25A, manufacturer=GCT, Package=0, Temperature="-40°C to +85°C", Temperature Range High=+85°C, Temperature Range Low=-40°C, Voltage Rating=20V, Automotive=No, Category=Conn, componentlink2description=Datasheet, componentlink2url=https://gct.co/files/drawings/usb4105.pdf, Conn Orientation="Right Angle", Contact Material=Gold,Nickel, Device Class L1=Connectors, Device Class L2="USB Connectors", Device Class L3=unset, Digikey Description="CONN RCPT USB2.0 TYPEC 5A", Height=3.46mm, Is Female=yes, Lead Free=Yes, Manufacturer Part Number=USB4105-GF-A, Number Of Contacts=16, Octopart=https://octopart.com/usb4105-gf-a-gct-106627878, RoHS=TRUE, Usb Standard="USB 2.0"
J2: library part CMP-11597-000004-1, "CONN MICRO SD CARD PUSH-PUSH R/A", Contact Resistance=100mR, Current Rating=500mA, Flammability Rating="UL94 V-0", Insulation Resistance=1GR, Max Operating Temperature=85°C, Max Voltage Rating (AC)=125V, Min Operating Temperature=-25°C, Package Quantity=1, Connector Type=Connector, Contact Material="Copper Alloy", Contact Plating=Gold, Depth=1.83mm, Gender=Female, Housing Material=Polymer, Lead Free="Lead Free", Length=13.85mm, Max Current Rating=500mA, Mount="Surface Mount", Number Of Contacts=8, Number of Positions=8, Number of Rows=1, Orientation="Right Angle", packaging="Tape and Reel", Pitch=1.1mm, Radiation Hardening=No, REACH SVHC="No SVHC", Termination=Solder, Voltage Rating (AC)=125V, Width=16.05mm
L1: library part 744761020A, "FIXED IND 2NH 700MA 80 MOHM SMD", Current Rating (Amps)=700mA, DC Resistance (DCR)="80mOhm Max", Device Package="0603 (1608 Metric)", Frequency - Self Resonant=6.9GHz, Inductance Frequency - Test=250MHz, manufacturer="Würth Elektronik", Operating Temperature="-40°C ~ 125°C", Q @ Freq="16 @ 250MHz", Supplier Device Package=0603, Supplier Part Number 1=732-744761020ACT-ND, Tolerance=±0.2nH, componentlink1description=Datasheet, componentlink1url=https://katalog.we-online.com/pbs/datasheet/744761020A.pdf, componentlink2description="DigiKey Link", componentlink2url=http://digikey.com/product-detail/en/w-rth-elektronik/744761020A/732-744761020ACT-ND/10668665, Inductance=2nH, lastupdated="06.09.2020 11:05:18", Lifecycle Status=Active, Material - Core=Ceramic, Minimum Order=1, Mounting Type="Surface Mount", Package / Case="0603 (1608 Metric)", packaging=Unknown, Part Number=744761020A, Part Status=Active, partid=1038, price=0.18, series=WE-KI, Shielding=Unshielded, Supplier 1=DigiKey, Type=Wirewound
L2 L3: library part LQW18ASR39J00D, "FIXED IND 390NH 100MA 4.35OHM SM", Current Rating (Amps)="100 mA", DC Resistance (DCR)="4.35Ohm Max", Device Package="0603 (1608 Metric)", Frequency - Self Resonant=900MHz, Inductance="390 nH", Inductance Frequency - Test="100 MHz", manufacturer="Murata Electronics", Operating Temperature="-40°C ~ 125°C", Q @ Freq="25 @ 100MHz", Supplier Device Package=0603, Supplier Part Number 1=490-LQW18ASR39J00DCT-ND, Tolerance=±5%, componentlink2description="DigiKey Link", componentlink2url=https://www.digikey.com/en/products/detail/murata-electronics/LQW18ASR39J00D/10702651, Height - Seated (Max)="0.039\" (1.00mm)", lastupdated="15.01.2024 21:33:43", Lifecycle Status=Active, Material - Core=Non-Magnetic, Minimum Order=1, Mounting Type="Surface Mount", Package / Case="0603 (1608 Metric)", packaging=TapeAndReel, Part Number=LQW18ASR39J00D, Part Status=Active, partid=1604, price=0.05, series=LQW15, Shielding=Unshielded, Size / Dimension="0.063\" L x 0.031\" W (1.60mm x 0.80mm)", Supplier 1=DigiKey, Type=Wirewound
L4: library part LQW15CE2R2M10D, "FIXED IND 2.2UH 85MA 1.8OHM SMD", Current Rating (Amps)="85 mA", DC Resistance (DCR)="1.8Ohm Max", Device Package="0402 (1005 Metric)", Frequency - Self Resonant=100MHz, Inductance Frequency - Test="1 MHz", manufacturer="Murata Electronics", Operating Temperature="-55°C ~ 125°C", Supplier Device Package=0402, Supplier Part Number 1=490-LQW15CE2R2M10DDKR-ND, Tolerance=±20%, componentlink1description=Datasheet, componentlink1url=https://search.murata.co.jp/Ceramy/image/img/P02/JELF243A-0187.pdf, componentlink2description="DigiKey Link", componentlink2url=https://www.digikey.com/en/products/detail/murata-electronics/LQW15CE2R2M10D/15843704, Height - Seated (Max)="0.024\" (0.60mm)", Inductance="2.2 µH", lastupdated="15.01.2024 21:33:44", Lifecycle Status=Active, Material - Core=Ferrite, Minimum Order=1, Mounting Type="Surface Mount", Package / Case="0402 (1005 Metric)", packaging=TapeAndReel, Part Number=LQW15CE2R2M10D, Part Status=Active, partid=1541, price=0.07, series=LQW15, Shielding=Unshielded, Size / Dimension="0.039\" L x 0.024\" W (1.00mm x 0.60mm)", Supplier 1=DigiKey, Type="Drum Core, Wirewound"
P1: library part CMP-2000-05633-1, "PicoBlade(TM) Header, Right Angle, -40 to 85 degC, 2-Pin SMD, RoHS, Tape and Reel", Current - Max=1A, manufacturer=Molex, Package Description="2-Leads Header, Pitch 1.25 mm, Mated Height 3.4 mm", Package Version="Rev. H, 11/2014", Voltage - Max=125V, Brand=Molex, Contact Material=PhosphorBronze, Contact Plating=Tin, Current Rating=1A, Datasheet URL=http://www.molex.com/webdocs/datasheets/pdf/en-us/0532610271_PCB_HEADERS.pdf, Datasheet Version=03/2016, Factory Pack Quantity=1000, Housing Material=Thermoplastic, Manufacturer URL=http://www.molex.com/, Mounting Angle=Right, Mounting Style=SMD/SMT, Mounting Technology=SurfaceMount, Number of Positions=2, Number of Positions / Contacts=2, Number of Rows=1, Package Reference=53261-0271, Package URL=http://www.molex.com/pdm_docs/sd/532610271_sd.pdf, packaging=Reel, Pitch=1.25mm, Product Category=1.25mmConnectors, Product Type=Headers, RoHS=Details, series=53261, Termination Style=SMD, Tradename=PicoBlade, Type=Shrouded, Voltage Rating=125V
R1 R6 R9 R10 R11 R12 R13 R21 R22 R23: library part RT0603FRE0710KL, "RES SMD 10K OHM 1% 1/10W 0603", Device Package="0603 (1608 Metric)", manufacturer=Yageo, Operating Temperature="-55°C ~ 155°C", Power (Watts)="0.1W, 1/10W", Supplier Device Package=0603, Supplier Part Number 1=YAG2321CT-ND, Temperature Coefficient=±50ppm/°C, Tolerance=±1%, componentlink1description=Datasheet, componentlink1url=https://www.yageo.com/upload/media/product/productsearch/datasheet/rchip/PYu-RT_1-to-0.01_RoHS_L_11.pdf, componentlink2description="DigiKey Link", componentlink2url=https://www.digikey.com/en/products/detail/yageo/RT0603FRE0710KL/1075040, Composition="Thin Film", Height - Seated (Max)="0.022\" (0.55mm)", lastupdated="15.01.2024 20:40:25", Lifecycle Status=Active, Minimum Order=1, Number of Terminations=2, Package / Case="0603 (1608 Metric)", packaging=TapeAndReel, Part Number=RT0603FRE0710KL, Part Status=Active, partid=5671, price=0.01, Resistance="10 kOhms", series=RT, Size / Dimension="0.063\" L x 0.031\" W (1.60mm x 0.80mm)", Supplier 1=DigiKey
R2 R3 R4 R5 R8 R15 R16 R17 R19: library part JR0603X26E, "0603 26 AMP JUMPER", Device Package="0603 (1608 Metric)", manufacturer=Ohmite, Operating Temperature="-55°C ~ 150°C", Power (Watts)=0.135W, Supplier Device Package=0603, Supplier Part Number 1=JR0603X26ECT-ND, Tolerance=Jumper, componentlink1description=Datasheet, componentlink1url=https://www.ohmite.com/assets/docs/res_jr.pdf?r=false, componentlink2description="DigiKey Link", componentlink2url=https://www.digikey.com/en/products/detail/ohmite/JR0603X26E/10233371, Composition="Metal Element", Height - Seated (Max)="0.022\" (0.55mm)", lastupdated="15.01.2024 20:40:20", Lifecycle Status=Active, Minimum Order=1, Number of Terminations=2, Package / Case="0603 (1608 Metric)", packaging=TapeAndReel, Part Number=JR0603X26E, Part Status=Active, partid=6812, price=0.10, Resistance="0 Ohms", series=JR, Size / Dimension="0.063\" L x 0.031\" W (1.60mm x 0.80mm)", Supplier 1=DigiKey
R7: library part JR0603X26E, "0603 26 AMP JUMPER", Device Package="0603 (1608 Metric)", manufacturer=Ohmite, Operating Temperature="-55°C ~ 150°C", Power (Watts)=0.135W, Resistance="0 Ohms", Supplier Device Package=0603, Supplier Part Number 1=JR0603X26ECT-ND, Tolerance=Jumper, componentlink1description=Datasheet, componentlink1url=https://www.ohmite.com/assets/docs/res_jr.pdf?r=false, componentlink2description="DigiKey Link", componentlink2url=https://www.digikey.com/en/products/detail/ohmite/JR0603X26E/10233371, Composition="Metal Element", Height - Seated (Max)="0.022\" (0.55mm)", lastupdated="15.01.2024 20:40:20", Lifecycle Status=Active, Minimum Order=1, Number of Terminations=2, Package / Case="0603 (1608 Metric)", packaging=TapeAndReel, Part Number=JR0603X26E, Part Status=Active, partid=6812, price=0.10, series=JR, Size / Dimension="0.063\" L x 0.031\" W (1.60mm x 0.80mm)", Supplier 1=DigiKey
R14: library part RMCF0603FT3K09, "RES 3.09K OHM 1% 1/10W 0603", Device Package="0603 (1608 Metric)", manufacturer="Stackpole Electronics Inc", Operating Temperature="-55°C ~ 155°C", Power (Watts)="0.1W, 1/10W", Ratings=AEC-Q200, Supplier Device Package=0603, Supplier Part Number 1=RMCF0603FT3K09CT-ND, Temperature Coefficient=±100ppm/°C, Tolerance=±1%, componentlink1description=Datasheet, componentlink1url=https://www.seielect.com/catalog/sei-rmcf_rmcp.pdf, componentlink2description="DigiKey Link", componentlink2url=https://www.digikey.com/en/products/detail/stackpole-electronics-inc/RMCF0603FT3K09/1761340, Composition="Thick Film", Features="Automotive AEC-Q200", Height - Seated (Max)="0.022\" (0.55mm)", lastupdated="15.01.2024 20:39:25", Lifecycle Status=Active, Minimum Order=1, Number of Terminations=2, Package / Case="0603 (1608 Metric)", packaging=CutTape, Part Number=RMCF0603FT3K09, Part Status=Active, partid=20368, price=0.01, Resistance="3.09 kOhms", series=RMCF, Size / Dimension="0.061\" L x 0.031\" W (1.55mm x 0.80mm)", Supplier 1=DigiKey
R18: library part RMCF0603JG1K80, "RES 1.8K OHM 5% 1/10W 0603", Device Package="0603 (1608 Metric)", manufacturer="Stackpole Electronics Inc", Operating Temperature="-55°C ~ 155°C", Power (Watts)="0.1W, 1/10W", Ratings=AEC-Q200, Supplier Device Package=0603, Supplier Part Number 1=RMCF0603JG1K80CT-ND, Temperature Coefficient=±200ppm/°C, Tolerance=±5%, componentlink1description=Datasheet, componentlink1url=https://www.seielect.com/catalog/sei-packaging.pdf, componentlink2description="DigiKey Link", componentlink2url=https://www.digikey.com/en/products/detail/stackpole-electronics-inc/RMCF0603JG1K80/1712125, Composition="Thick Film", Features="Automotive AEC-Q200", Height - Seated (Max)="0.022\" (0.55mm)", lastupdated="15.01.2024 20:39:16", Lifecycle Status=Active, Minimum Order=1, Number of Terminations=2, Package / Case="0603 (1608 Metric)", packaging=CutTape, Part Number=RMCF0603JG1K80, Part Status=Active, partid=22440, price=0.01, Resistance="1.8 kOhms", series=RMCF, Size / Dimension="0.061\" L x 0.031\" W (1.55mm x 0.80mm)", Supplier 1=DigiKey
R20: library part RC0603FR-131K2L, "RES 1.2K OHM 1% 1/10W 0603", Device Package="0603 (1608 Metric)", manufacturer=Yageo, Operating Temperature="-55°C ~ 155°C", Power (Watts)="0.1W, 1/10W", Supplier Device Package=0603, Supplier Part Number 1=13-RC0603FR-131K2LCT-ND, Temperature Coefficient=±100ppm/°C, Tolerance=±1%, componentlink1description=Datasheet, componentlink1url=https://www.yageo.com/upload/media/product/productsearch/datasheet/rchip/PYu-RC_Group_51_RoHS_L_11.pdf, componentlink2description="DigiKey Link", componentlink2url=https://www.digikey.com/en/products/detail/yageo/RC0603FR-131K2L/14008161, Composition="Thick Film", Height - Seated (Max)="0.022\" (0.55mm)", lastupdated="15.01.2024 20:38:11", Lifecycle Status=Active, Minimum Order=1, Number of Terminations=2, Package / Case="0603 (1608 Metric)", packaging=CutTape, Part Number=RC0603FR-131K2L, Part Status=Active, partid=65573, price=0.01, Resistance="1.2 kOhms", series=RC_L, Size / Dimension="0.063\" L x 0.031\" W (1.60mm x 0.80mm)", Supplier 1=DigiKey
R24 R25: library part RR0816P-512-D, "RES SMD 5.1K OHM 0.5% 1/16W 0603", Device Package="0603 (1608 Metric)", manufacturer=Susumu, Operating Temperature="-55°C ~ 125°C", Power (Watts)="0.063W, 1/16W", Supplier Device Package=0603, Supplier Part Number 1=RR08P5.1KDCT-ND, Temperature Coefficient=±25ppm/°C, Tolerance=±0.5%, componentlink1description=Datasheet, componentlink1url=http://www.susumu.co.jp/common/pdf/n_catalog_partition05_en.pdf, componentlink2description="DigiKey Link", componentlink2url=https://www.digikey.com/en/products/detail/susumu/RR0816P-512-D/432202, Composition="Thin Film", Height - Seated (Max)="0.020\" (0.50mm)", lastupdated="15.01.2024 20:39:40", Lifecycle Status=Active, Minimum Order=1, Number of Terminations=2, Package / Case="0603 (1608 Metric)", packaging=TapeAndReel, Part Number=RR0816P-512-D, Part Status=Active, partid=16877, price=0.01, Resistance="5.1 kOhms", series=RR, Size / Dimension="0.063\" L x 0.031\" W (1.60mm x 0.80mm)", Supplier 1=DigiKey
R26: library part RC0603FR-1052K3L, "RES 52.3K OHM 1% 1/10W 0603", Device Package="0603 (1608 Metric)", manufacturer=Yageo, Operating Temperature="-55°C ~ 155°C", Power (Watts)="0.1W, 1/10W", Supplier Device Package=0603, Supplier Part Number 1=13-RC0603FR-1052K3LCT-ND, Temperature Coefficient=±100ppm/°C, Tolerance=±1%, componentlink1description=Datasheet, componentlink1url=https://www.yageo.com/upload/media/product/productsearch/datasheet/rchip/PYu-RC_Group_51_RoHS_L_11.pdf, componentlink2description="DigiKey Link", componentlink2url=https://www.digikey.com/en/products/detail/yageo/RC0603FR-1052K3L/14008206, Composition="Thick Film", Height - Seated (Max)="0.022\" (0.55mm)", lastupdated="15.01.2024 20:38:08", Lifecycle Status=Active, Minimum Order=1, Number of Terminations=2, Package / Case="0603 (1608 Metric)", packaging=CutTape, Part Number=RC0603FR-1052K3L, Part Status=Active, partid=65325, price=0.01, Resistance="52.3 kOhms", series=RC_L, Size / Dimension="0.063\" L x 0.031\" W (1.60mm x 0.80mm)", Supplier 1=DigiKey
S1 S2 S3: "SWITCH TACTILE SPST-NO 0.05A 16V", Contact Rating @ Voltage="0.05A @ 16VDC", manufacturer=C&K, Operating Force=160gf, Operating Temperature="-40°C ~ 85°C", Supplier Part Number 1=CKN10502CT-ND, Actuator Height off PCB, Vertical=2.50mm, Actuator Orientation="Top Actuated", Actuator Type="Oval Button", Circuit=SPST-NO, componentlink1description=Datasheet, componentlink1url=https://dznh3ojzb2azq.cloudfront.net/products/Tactile/PTS810/documents/datasheet.pdf, componentlink2description="DigiKey Link", componentlink2url=http://digikey.com/product-detail/en/c-k/PTS810-SJM-250-SMTR-LFS/CKN10502CT-ND/4176673, Illumination=Non-Illuminated, lastupdated="09.04.2020 10:00:13", Lifecycle Status=Active, Minimum Order=1, Mounting Type="Surface Mount", Outline="4.20mm x 3.20mm", packaging=TapeAndReel, Part Number="PTS810 SJM 250 SMTR LFS", Part Status=Active, price=0.16, series=PTS810, Supplier 1=DigiKey, Switch Function=Off-Mom, Termination Style="J Lead"
U1: library part CMP-0321-00214-2, "USB-Friendly Li-Ion Battery Charger and Power-Path Management IC, Vout 4.4 V, 4.3 V, -40 to 85 degC, 16-pin QFN (RGT), Green (RoHS & no Sb/Br)", manufacturer="Texas Instruments", Over Voltage Protection=N, Code_JEDEC=MO-220, componentlink1description=Datasheet, componentlink1url=http://www.ti.com/general/docs/lit/getliterature.tsp?genericPartNumber=BQ24073&fileType=pdf, DatasheetVersion=SLUS810G, Eco-Plan="Green (RoHS & no Sb/Br)", Lead Acid=N, Li-Ion=N, Li-Polymer=N, Mounting Technology="Surface Mount", NiCd=N, NiMH=N, PackageDescription="16-Pin Plastic Quad Flat No-Lead, 3 x 3 mm Body, 0.5 mm Pitch, 1.7 x 1.7 mm Exposed Pad", PackageReference=RGT0016C, PackageVersion="revH, Oct-2011", PartNumber=BQ24073RGTT, SubFamily="Battery Charge Management", Vin(Min)(V)=4.3
U2: library part CMP-00196-59660426-1, "TLE49655MXTSA1 Hall Effect Sensor 5mA Unipolar 3.3V/5V Automotive 3-Pin SOT-23 T/R", Case/Package=SOT-23, Max Operating Temperature=170°C, Max Output Current=5mA, Max Supply Current=1.4mA, Min Operating Temperature=-40°C, Operating Supply Voltage=5.5V, Package Quantity=3000, Lifecycle Status=Production, Mount="Surface Mount", NexarPartId=59660426, Number of Pins=3, packaging="Tape & Reel", Polarity="South Pole", RoHS=Compliant, Schedule B="8542390000, 8542390000", Sensing Method="Hall Effect"
U3: library part CMP-0550-00041-2, "Light-to-Digital Converter, 2.7 to 3.6 V, FN-6, Pb-Free, Reel", manufacturer=AMS, Supply Voltage (V)="2.7 - 3.6", componentlink1description="Manufacturer URL", componentlink1url=www.ams.com, componentlink2description=Datasheet, componentlink2url=http://www.ams.com/eng/content/download/250096/975518/143687, DatasheetVersion=TAOS059Q, Interface="I2C - 1.8", Maximum Lux=40000, Mounting Technology="Surface Mount", PackageDescription="6-Pin Dual Flat No-Lead, 2 x 2 mm Body, 0.65 mm Pitch", PackageReference=FN-6, PackageVersion="TAOS059Q, 11/2009", PartNumber=TSL2561FN, Programmable="Gain, Integration Time , Interrupt"
U4: library part CMP-04918-000211-1, "STEP DOWN CONVERTER", RoHS Compliant=Yes
U5: library part CMP-2000-05073-3, "SENSOR PRESSURE HUMIDITY TEMP", Case/Package=LGA, Max Operating Temperature=85°C, Min Operating Temperature=-40°C, Accuracy=3%, Lead Free="Lead Free", Mount="Surface Mount", Number of Pins=8, Output Type=SPI, packaging="Cut Tape", Response Time=1s, Sensor Type=Temperature
Y1: library part CMP-03913-116855769-1, "830108208709 WE-XTAL Quartz Crystal", Frequency=40MHz, Max Operating Temperature=70°C, Min Operating Temperature=-20°C, Height=600µm, Length=2.5mm, NexarPartId=116855769, Width=2mm
Y2: library part CMP-27762-015873-1, "Crystal 32.768kHz ±10ppm (Tol) 7pF FUND 70kΩ 2-Pin CSMD T/R", Case/Package=SMD/SMT, ESR (Equivalent Series Resistance)=70kR, Frequency=32.768kHz, Frequency Tolerance=10ppm, Load Capacitance=7pF, Max Operating Temperature=85°C, Min Operating Temperature=-40°C, Operating Frequency="32.768 kHz", Height=0.035inch, Lead Free="Lead Free", Length=0.126inch, Mount="Surface Mount", packaging="Cut Tape", RoHS Compliant=Yes, series=ABS07, Width=0.061inch

## Via types
v1: diameter 19.68, hole 11.81, Top Layer to Bottom Layer, 33 vias
v2: diameter 19.68, hole 7.87, Top Layer to Bottom Layer, 6 vias
v3: diameter 50, hole 28, Top Layer to Bottom Layer, 5 vias

## Nets (pads, with @x,y where several pads share a name; then routed paths per layer and width w, separated by ;. In a path a pad name is that pad's centre, name@x,y a point inside that pad or via, vN(x,y) a via of type N, cw(c..) or ccw(c..) an arc to the next point about the centre after c; other vN are vias at no path point)
+4.2: C17.2 D2.1 D3.1 U1.5 U1.10 U1.11 U4.5 U4.6 | length 781.2